# EAGLE board ledchaser (EAGLE 9.4.2)
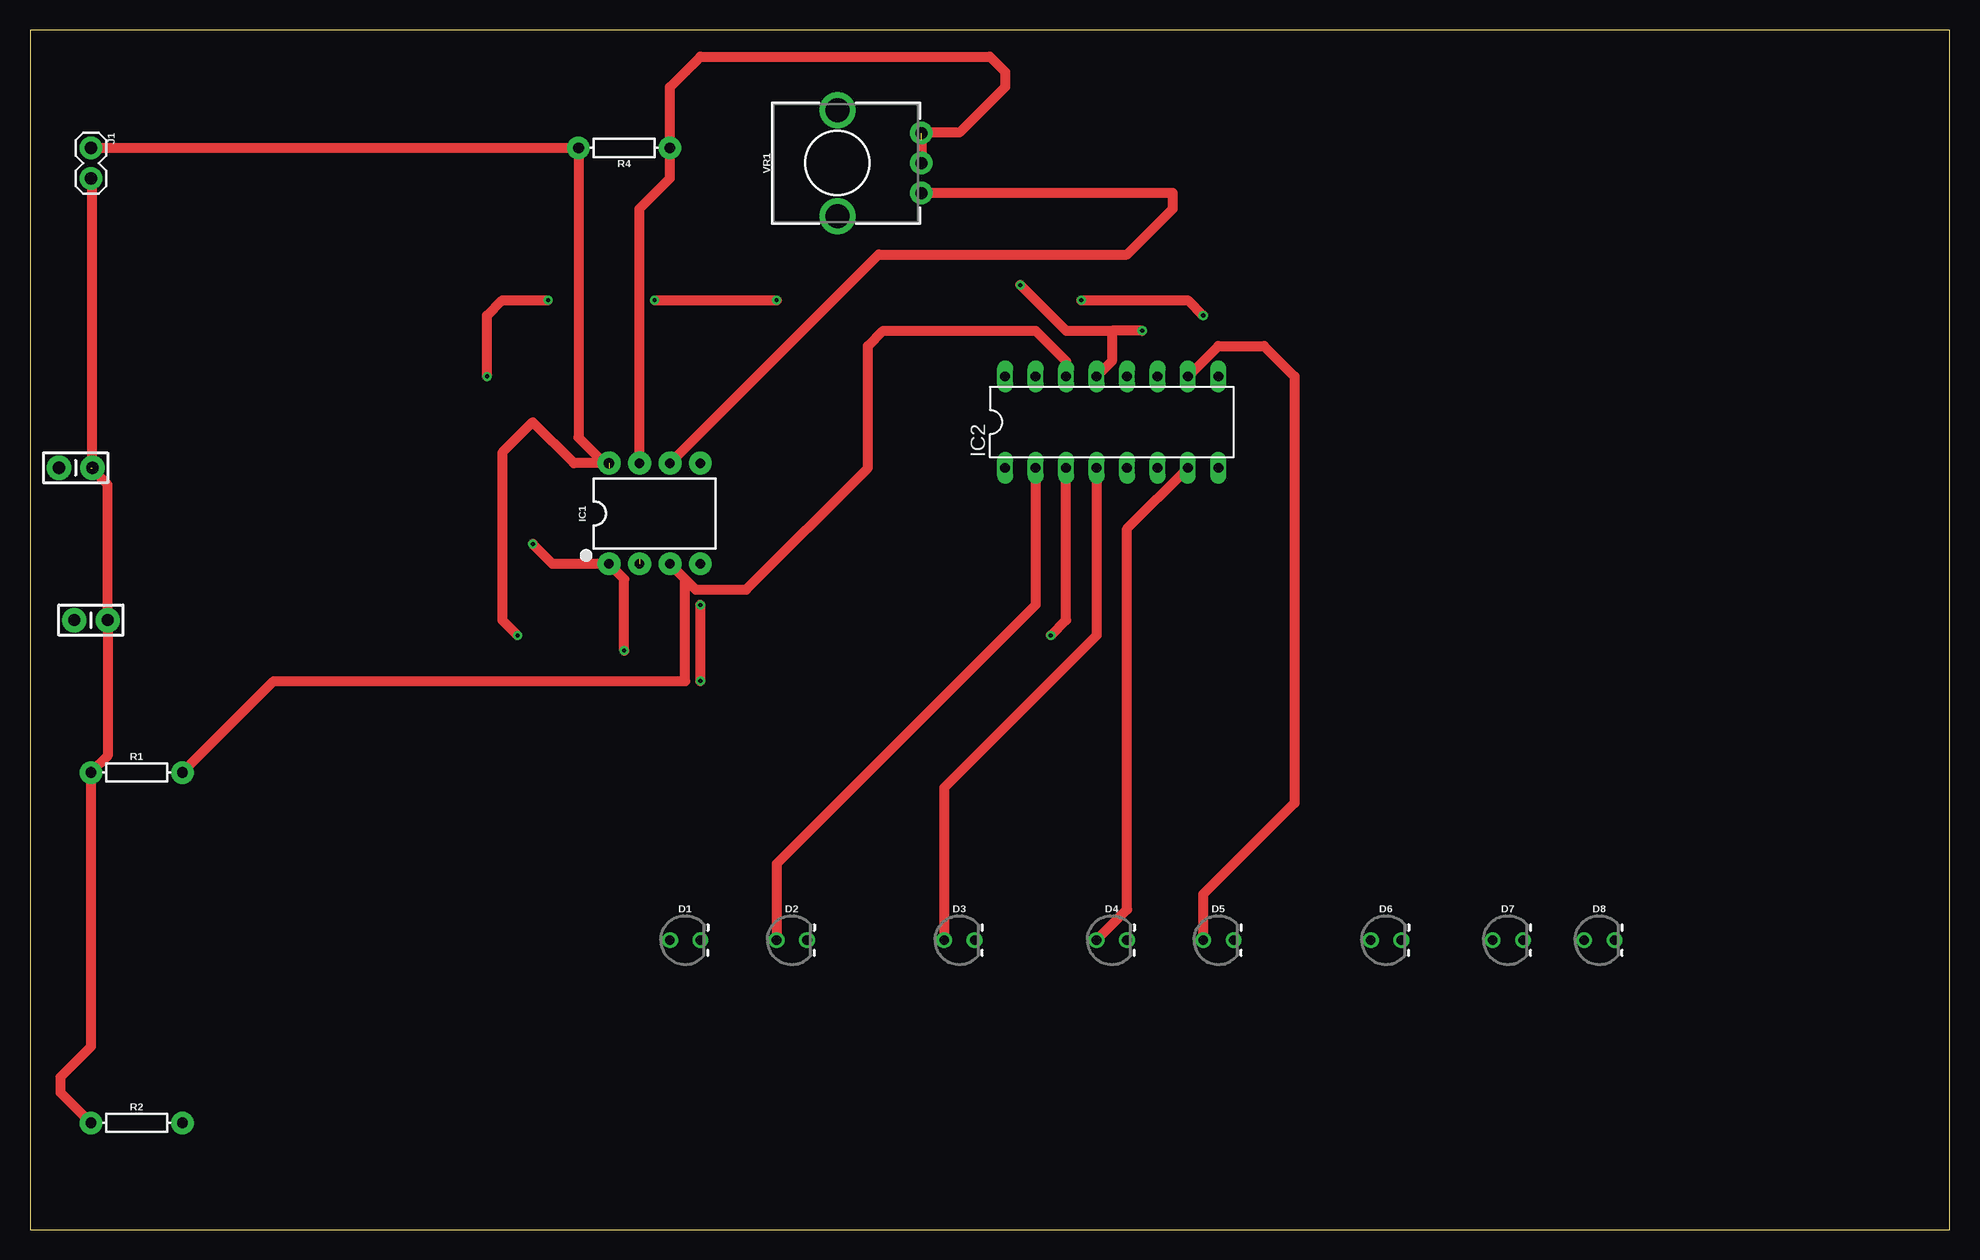
[diagram p0: board, top side]
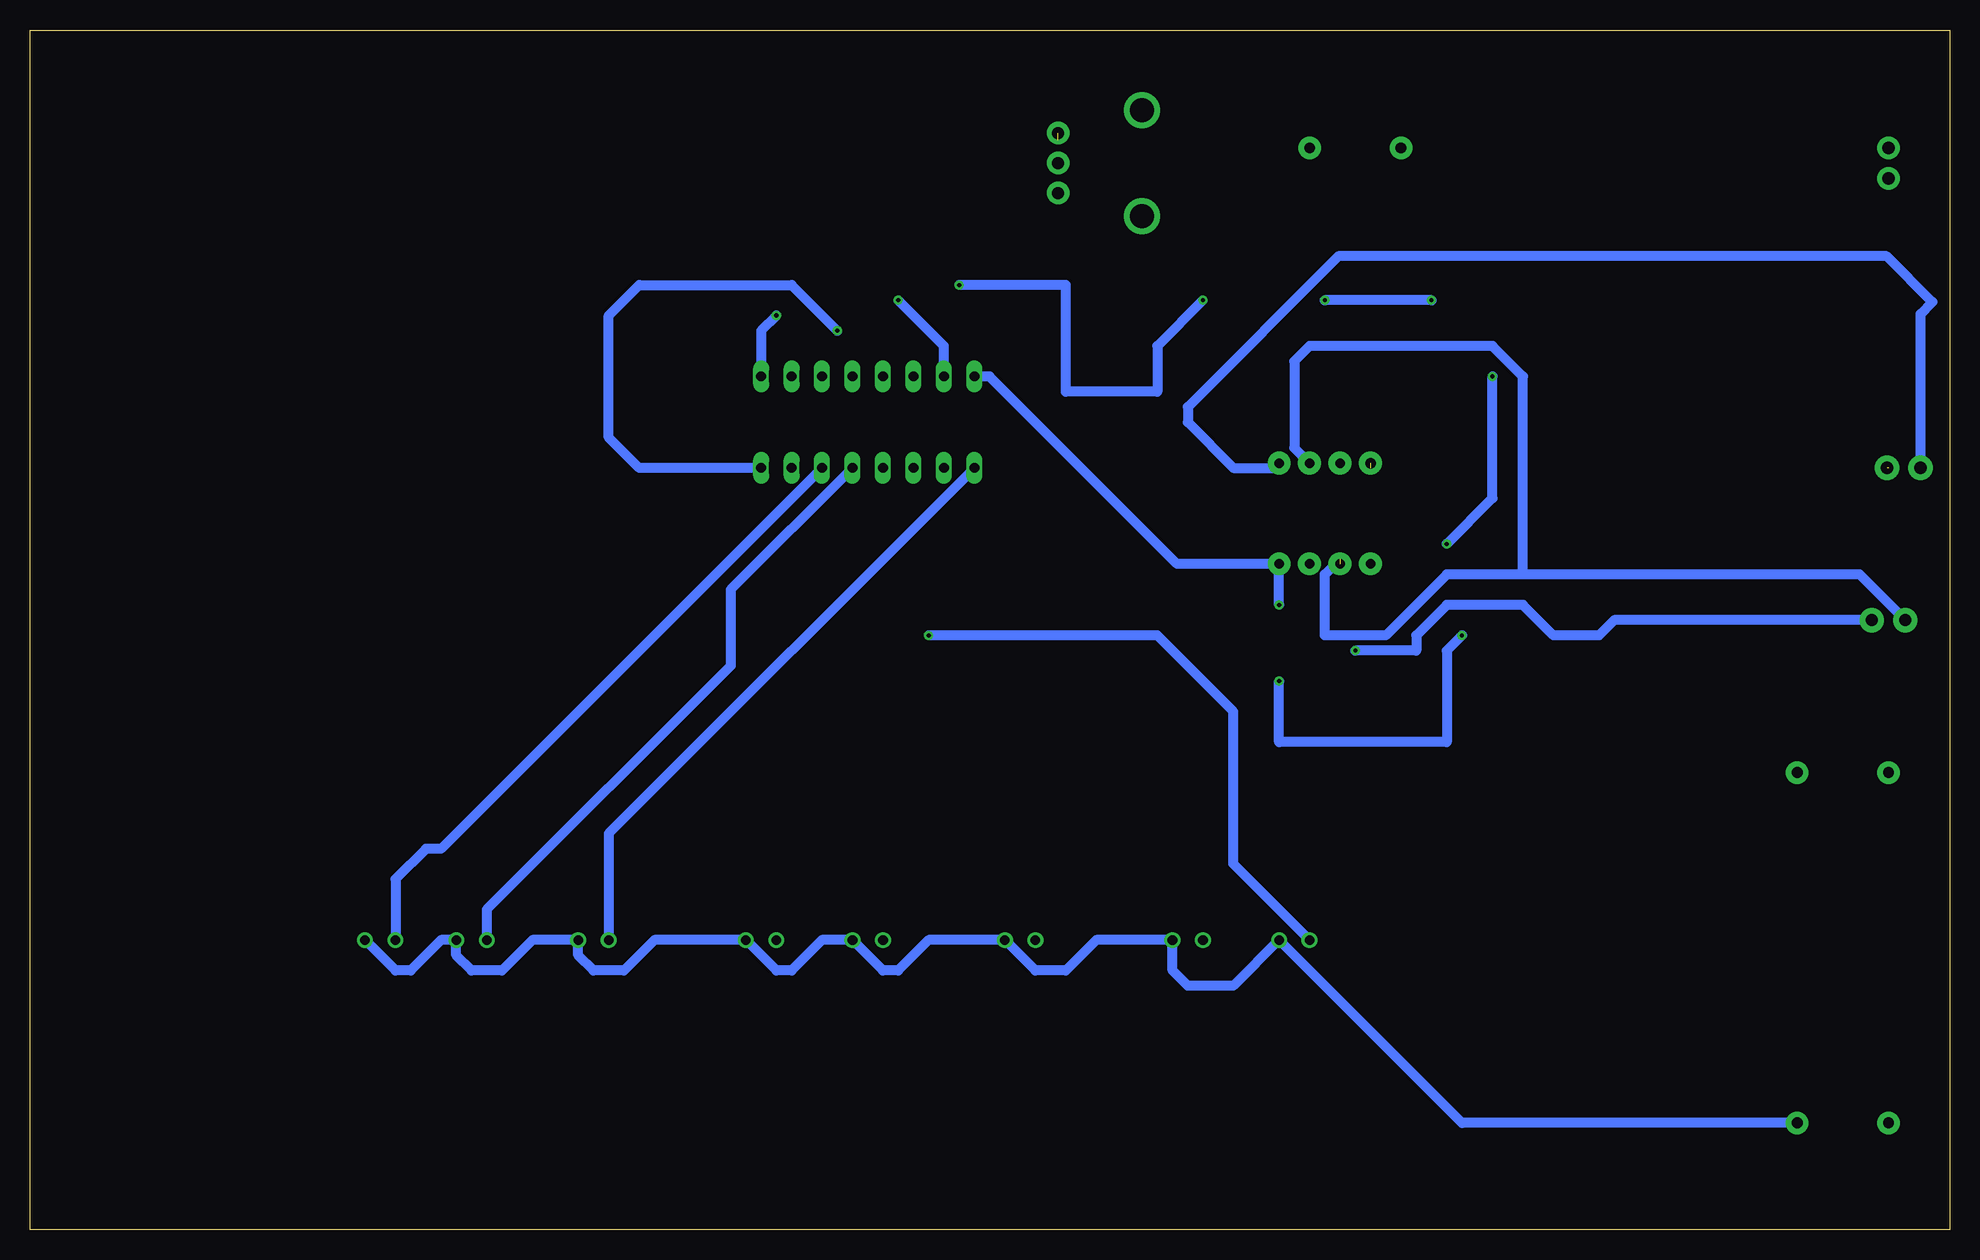
[diagram p1: board, bottom side, seen from below]

Size 160 x 100 mm. Coordinates in mm from the lower left corner, seen from the top.
Outline: 0,0 160,0 160,100 0,100 0,0
Copper layers (1*16): Top 0.035mm / dielectric 1.5mm / Bottom 0.035mm
Design rules "default": minimum track width 6mil, minimum drill 0.35mm, track to track 6mil, track to pad 6mil, pad to pad 6mil, via to via 6mil, smd to smd 6mil, copper to edge 40mil, drill to drill 6mil, minimum pad ring 10mil, minimum via ring 8mil, stop-mask expansion 4mil, vias tented up to drill 0mil, thermal gap 10mil

## Footprints (pad centres in the part's own frame; a part is rotated, then mirrored left to right if it is on the bottom)
CAP-PTH-SMALL-KIT = drill 1.016 pad 2.032: 1 -1.397,0; 2 1.397,0
LED_3MM-NS = drill 0.813: A -1.27,0; K 1.27,0
DIP08-KIT = drill 0.813 pad 1.905: 1 -3.81,-4.191; 2 -1.27,-4.191; 3 1.27,-4.191; 4 3.81,-4.191; 5 3.81,4.191; 6 1.27,4.191; 7 -1.27,4.191 | drill 0.864 pad 1.905: 8 -3.81,4.191
DIL16 = drill 0.813 long: 1 -8.89,-3.81; 2 -6.35,-3.81; 3 -3.81,-3.81; 4 -1.27,-3.81; 5 1.27,-3.81; 6 3.81,-3.81; 7 6.35,-3.81; 8 8.89,-3.81; 9 8.89,3.81; 10 6.35,3.81; 11 3.81,3.81; 12 1.27,3.81; 13 -1.27,3.81; 14 -3.81,3.81; 15 -6.35,3.81; 16 -8.89,3.81
1X02 = drill 1.016 pad 1.88: 1 0,0; 2 2.54,0
AXIAL-0.3 = drill 0.9 pad 1.88: P$1 -3.81,0; P$2 3.81,0
POT-PTH-ALPS-KIT = drill 1 pad 1.88: P$1 7,-2.5; P$2 7,0; P$3 7,2.5 | drill 2: P$4 0,-4.4; P$5 0,4.4

## Placement (x,y rotation side)
C1  0.1uF  [CAP-PTH-SMALL-KIT]  5.08,50.8 0 top
C2  0.01uF  [CAP-PTH-SMALL-KIT]  3.81,63.5 0 top
D1  [LED_3MM-NS]  54.61,24.13 0 top
D2  [LED_3MM-NS]  63.5,24.13 0 top
D3  [LED_3MM-NS]  77.47,24.13 0 top
D4  [LED_3MM-NS]  90.17,24.13 0 top
D5  [LED_3MM-NS]  99.06,24.13 0 top
D6  [LED_3MM-NS]  113.03,24.13 0 top
D7  [LED_3MM-NS]  123.19,24.13 0 top
D8  [LED_3MM-NS]  130.81,24.13 0 top
IC1  555  [DIP08-KIT]  52.07,59.69 0 top
IC2  4017N  [DIL16]  90.17,67.31 0 top
J1  [1X02]  5.08,90.17 270 top
R1  10k  [AXIAL-0.3]  8.89,38.1 0 top
R2  100  [AXIAL-0.3]  8.89,8.89 0 top
R4  1M  [AXIAL-0.3]  49.53,90.17 180 top
VR1  1M  [POT-PTH-ALPS-KIT]  67.31,88.9 0 top

## Library data of the parts
C1 C2 = SparkFun-Capacitors; PROD_ID: CAP-08370
D1-D8 = SparkFun-LED
IC1 = SparkFun-IC-Special-Function; PROD_ID: IC-09173; PROD_ID_ALT: IC-11930
IC2 = 40xx
J1 = SparkFun-Connectors
R1 R2 R4 = SparkFun-Resistors; PROD_ID: RES-12182
VR1 = SparkFun-Resistors; PROD_ID: RES-09177; SF_SKU: COM-09288

## Nets
12V: IC1.4 IC1.8 IC2.16 J1.1 R4.P$2
GND: C1.2 C2.2 IC1.1 IC2.8 IC2.13 J1.2 R1.P$1 R2.P$1
N$1: C2.1 IC1.5
N$2: C1.1 IC1.2 IC1.6 VR1.P$1
N$3: IC1.7 R4.P$1 VR1.P$2 VR1.P$3
N$4: IC1.3 IC2.14 R1.P$2
N$5: D1.A IC2.3
N$6: D2.A IC2.2
N$7: IC2.9 IC2.15
N$8: D3.A IC2.4
N$9: D4.A IC2.7
N$10: D5.A IC2.10
N$11: D6.A IC2.1
N$12: D7.A IC2.5
N$13: D8.A IC2.6
N$14: D1.K D2.K D3.K D4.K D5.K D6.K D7.K D8.K R2.P$2

## Tracks (layer width: path | path; a pad name or v marks a point on that pad's centre or on a via)
12V  (via drill 0.35)  (1 unrouted)
  Top 0.813: 48.26,63.5 45.72,66.04 R4.P$2 J1.1 | IC1.8 45.34,63.88 41.91,67.31 39.37,64.77 39.37,50.8 v40.64,49.53 | v55.88,45.72 v55.88,52.07
  Bottom 0.813: IC2.16 80.01,71.12 64.39,55.5 IC1.4 v55.88,52.07 | v40.64,49.53 41.91,48.26 41.91,40.64 55.88,40.64 v55.88,45.72
GND  (via drill 0.35)  (1 unrouted)
  Top 0.813: C2.2 5.21,87.5 J1.2 | 5.08,63.5 6.48,62.1 C1.2 6.48,39.5 R1.P$1 5.08,15.24 2.54,12.7 2.54,11.43 R2.P$1 | v49.53,48.26 49.53,54.23 IC1.1 43.56,55.5 v41.91,57.15 | v38.1,71.12 38.1,76.2 39.37,77.47 v43.18,77.47 | v52.07,77.47 v62.23,77.47 | v82.55,78.74 86.36,74.93 90.17,74.93 | 90.17,74.93 90.17,72.39 IC2.13 | v92.71,74.93 90.17,74.93
  Bottom 0.813: C1.2 27.94,50.8 29.21,49.53 33.02,49.53 35.56,52.07 41.91,52.07 44.45,49.53 44.45,48.26 v49.53,48.26 | v41.91,57.15 38.1,60.96 v38.1,71.12 | v43.18,77.47 v52.07,77.47 | v62.23,77.47 66.04,73.66 66.04,69.85 73.66,69.85 73.66,78.74 v82.55,78.74 | IC2.8 109.22,63.5 111.76,66.04 111.76,76.2 109.22,78.74 96.52,78.74 v92.71,74.93
N$1
  Bottom 0.813: C2.1 2.41,76.33 1.42,77.32 5.23,81.13 50.95,81.13 63.5,68.58 63.5,67.31 59.69,63.5 56.26,63.5 IC1.5
N$2  (1 unrouted)
  Top 0.813: IC1.6 70.74,81.28 91.44,81.28 95.25,85.09 95.25,86.4 VR1.P$1
  Bottom 0.813: C1.1 7.49,54.61 35.56,54.61 | 35.56,54.61 41.91,54.61 46.99,49.53 52.07,49.53 52.07,54.61 50.8,55.88 | 35.56,54.61 35.56,71.12 38.1,73.66 53.34,73.66 54.61,72.39 54.61,65.15 IC1.6
N$3  (1 unrouted)
  Top 0.813: IC1.7 50.8,85.09 53.34,87.63 R4.P$1 53.34,95.25 55.88,97.79 80.01,97.79 81.28,96.52 81.28,95.25 77.47,91.44 74.93,91.44 74.31,90.82 VR1.P$2
N$4
  Top 0.813: R1.P$2 20.32,45.72 54.61,45.72 54.61,54.23 IC1.3 55.5,53.34 59.69,53.34 69.85,63.5 69.85,73.66 71.12,74.93 83.82,74.93 86.36,72.39 IC2.14
N$5  (via drill 0.35)
  Top 0.813: v85.09,49.53 86.36,50.8 IC2.3
  Bottom 0.813: D1.A 59.69,30.48 59.69,43.18 66.04,49.53 v85.09,49.53
N$6
  Top 0.813: IC2.2 83.82,52.07 62.23,30.48 D2.A
N$7  (via drill 0.35)
  Top 0.813: v87.63,77.47 96.52,77.47 v97.79,76.2
  Bottom 0.813: IC2.15 83.82,73.66 v87.63,77.47 | v97.79,76.2 99.06,74.93 IC2.9
N$8
  Top 0.813: IC2.4 88.9,49.53 76.2,36.83 D3.A
N$9
  Top 0.813: D4.A 91.44,26.67 91.44,58.42 IC2.7
N$10
  Top 0.813: IC2.10 99.06,73.66 102.87,73.66 105.41,71.12 105.41,35.56 97.79,27.94 D5.A
N$11
  Bottom 0.813: IC2.1 111.76,33.02 D6.A
N$12
  Bottom 0.813: IC2.5 101.6,53.34 101.6,46.99 121.92,26.67 D7.A
N$13
  Bottom 0.813: IC2.6 125.73,31.75 127,31.75 129.54,29.21 D8.A
N$14
  Bottom 0.813: R2.P$2 40.64,8.89 D1.K 59.69,20.32 63.5,20.32 64.77,21.59 D2.K 71.12,24.13 73.66,21.59 76.2,21.59 D3.K 85.09,24.13 87.63,21.59 88.9,21.59 D4.K 93.98,24.13 96.52,21.59 97.79,21.59 D5.K 107.95,24.13 110.49,21.59 113.03,21.59 114.3,22.86 D6.K 118.11,24.13 120.65,21.59 123.19,21.59 124.46,22.86 D7.K 125.73,24.13 128.27,21.59 129.54,21.59 D8.K